# Altium PCB PCB.PcbDoc
Units mm, origin at the board's own origin, x right, y up, seen from the top; angles counter-clockwise.
Board outline 150 x 100 mm, 2 copper layers (Top Layer, Bottom Layer); 15 components, 9 nets, 59 pads, 1 vias.
Unrouted connection lines stored in the file: 2.
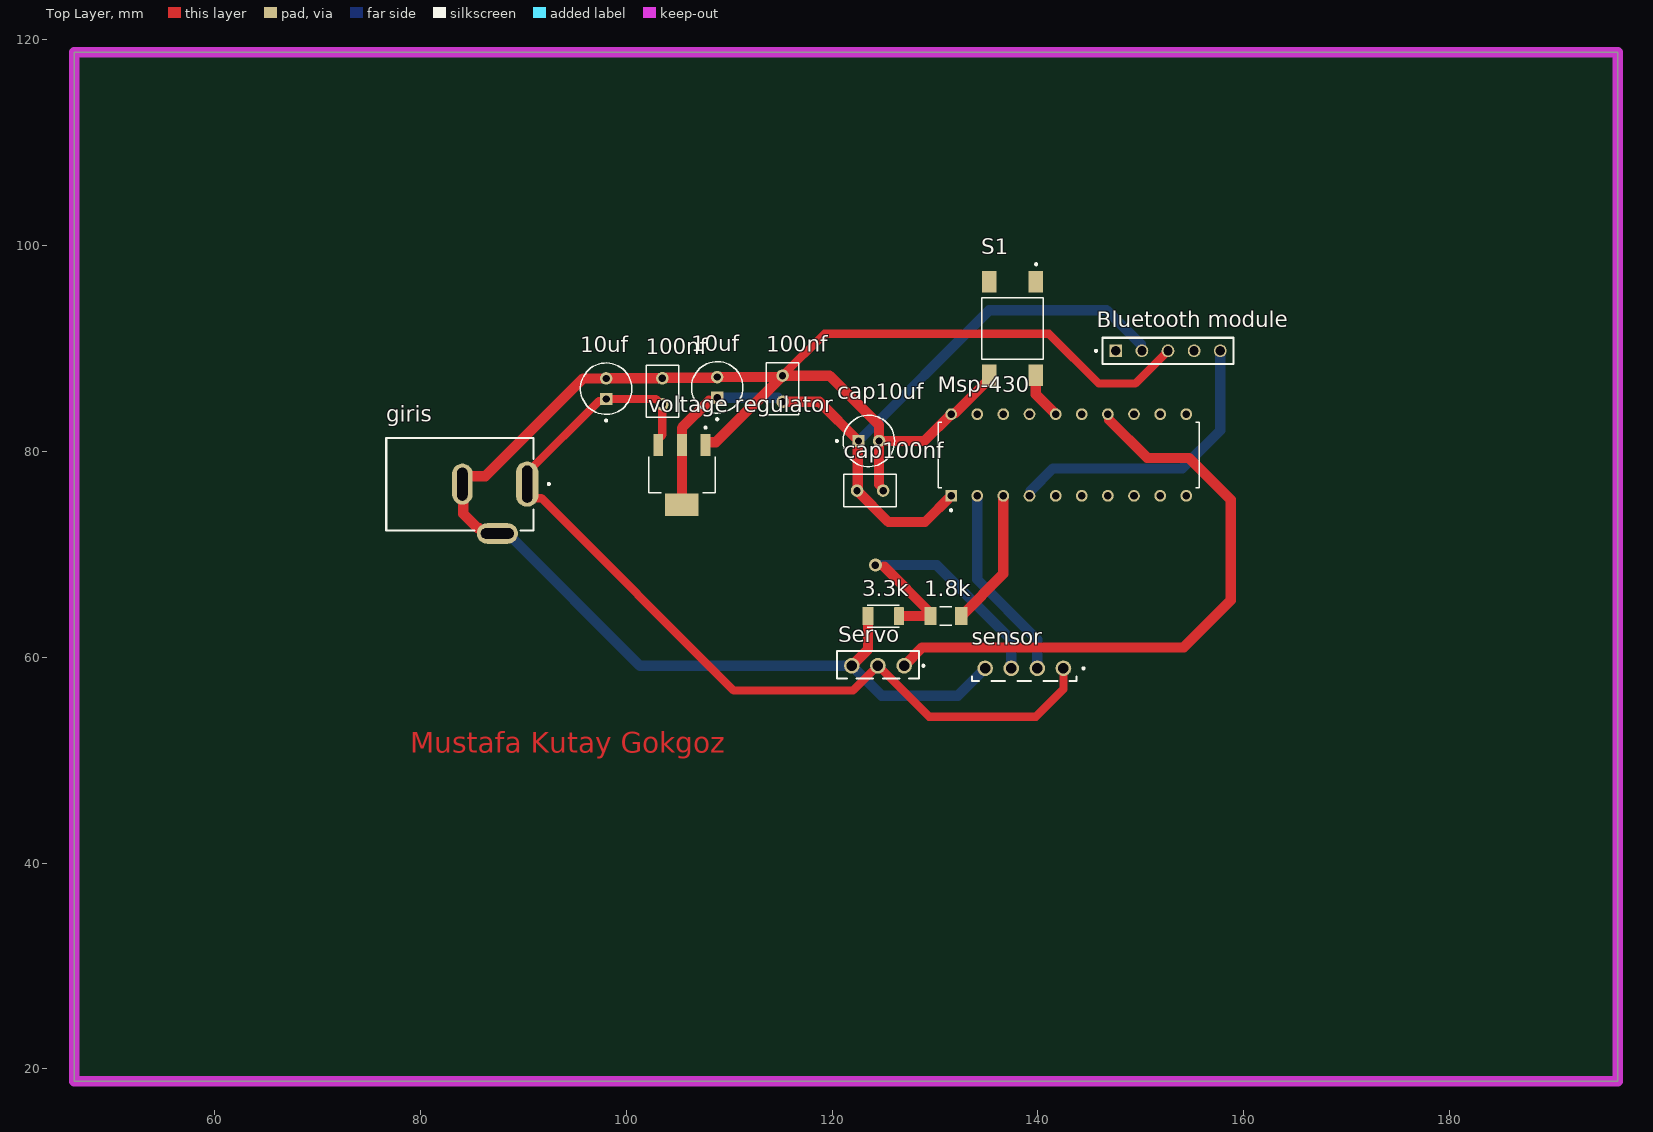
[diagram p0: Top Layer view]
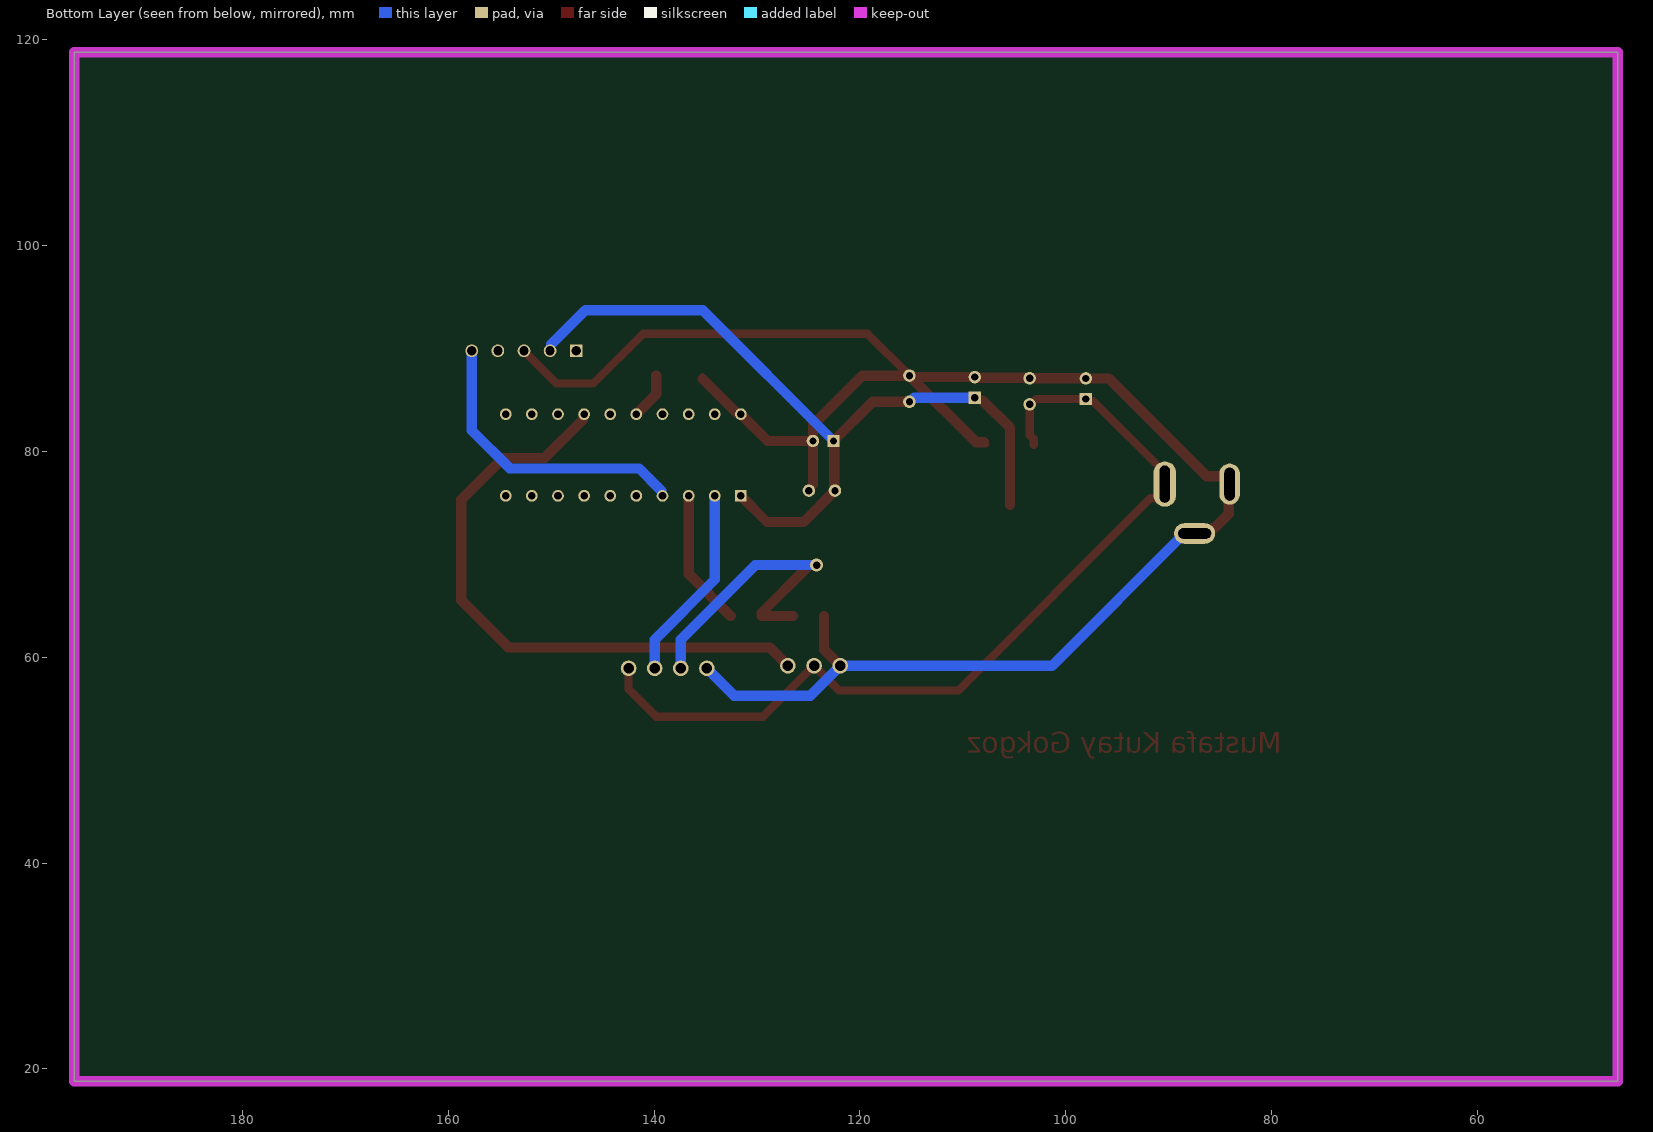
[diagram p1: Bottom Layer view, seen from below]
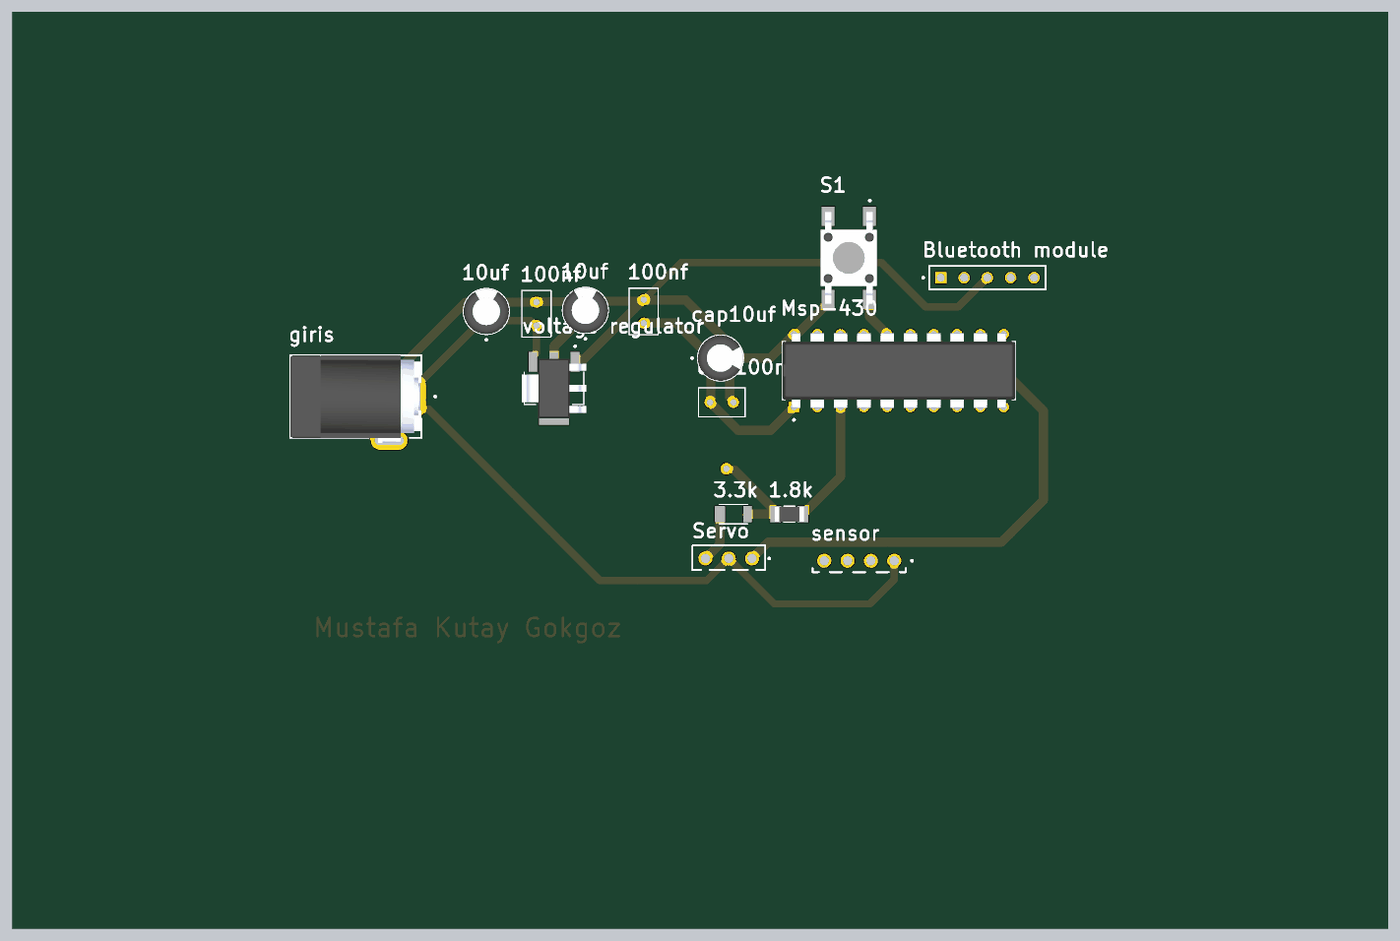
[diagram p2: 3D render of the assembled board from above, using the file's embedded part models]

## Layer stack, top to bottom
Top Solder: solder mask 0.0102, Solder Resist, Dk 3.5
Top Layer: signal copper 0.0356
Dielectric 1: dielectric 0.32, FR-4, Dk 4.8
Bottom Layer: signal copper 0.0356
Bottom Solder: solder mask 0.0102, Solder Resist, Dk 3.5

## Board outline
46.355,18.796 46.355,118.796 196.355,118.796 196.355,18.796

## Design rules (kind name [scope] priority, off if disabled: settings)
Clearance [All] p1: gap=0.254 ignorepadtopadclearanceinfootprint=FALSE except(0: Arc-Hole Track-Hole SMDPad-Hole THPad-Hole Via-Hole Fill-Hole Poly-Hole Region-Hole Text-Hole)
PolygonConnect [All] p1: connectstyle=Relief reliefconductorwidth=0.254 reliefentries=4 polygonreliefangle="90 Angle" airgapwidth=0.254
RoutingVias [All] p1: holewidth=0.711 width=1.27 viastyle="Through Hole" minholewidth=0.711 minwidth=1.27 maxholewidth=0.711 maxwidth=1.27
SolderMaskExpansion [All] p1: expansion=0.102 istentingtop=FALSE
Width [All] p1: maxlimit=1 minlimit=0.254 preferedwidth=0.6 minimp=50.000000 maximp=50.000000 favimp=50.000000
30 further rules are at their usual default settings.

## Classes and differential pairs
component class Sheet1: 1.8k 3.3k 10uf 100nf "Bluetooth module" cap10uf cap100nf giris Msp-430 S1 sensor Servo "voltage regulator"

## Components (designator, comment, footprint, x,y, rotation, side; value= is the part's Value field where it differs from the comment)
1.8k "1.8k" RESC3216X75N 131.064,64.008 r0 top
3.3k "3.3k" RESC3115X65N 124.968,64.008 r0 top
10uf "10uf reg_giris" CAPPRD200W50D550H1250 98.044,86.106 r90 top
10uf "10uf  msp" CAPPRD200W50D550H1250 108.839,86.233 r90 top
100nf "100nf msp" CAPRR254W50L508T317H508 115.189,86.106 r270 top
100nf "100nf _reg_giris" CAPRR254W50L508T317H508 103.505,85.852 r90 top
"Bluetooth module" "BCS-105-F-S-TE" SAMTEC_BCS-105-F-S-TE 152.654,89.789 r0 top
cap10uf "10uf" CAPPRD200W50D550H1250 123.571,81.026 r0 top
cap100nf "100nf" CAPRR254W50L508T317H508 123.698,76.2 r0 top
giris "DCJ200-10-A-XX-K_REVA" GCT_DCJ200-10-A-XX-K_REVA 83.82,76.835 r270 top
Msp-430 "MSP430G2553IN20" DIP794W45P254L2540H508Q20 143.002,79.662 r90 top
S1 "3-1437565-0" SW_3-1437565-0 137.541,91.948 r270 top
sensor "MTLW-104-X-X-S-X" SAMTEC_MTLW-104-X-X-S-X 138.684,58.928 r0 top
Servo "MTLW-103-XX-XX-S-XXX" SAMTEC_MTLW-103-XX-XX-S-XXX 124.46,59.182 r0 top
"voltage regulator" "LM1117MPX-3.3" VREG_LM1117MPX-3.3 105.41,77.724 r270 top

## Footprints (in the part's own frame and the unit in brackets; to place one, negate y for a bottom-side part, rotate by r counter-clockwise, add the part's x,y. Pads: shape width x height; smd on the part's side, far side on the other; paste and mask are expansions set on the pad)
CAPPRD200W50D550H1250 [mm]
  rect 1.208x1.208 hole 0.7: 1(-1,0)
  round 1.208 hole 0.7: 2(1,0)
  silkscreen extent -3.2,-2.5 2.5,2.5, body extent -2.5,-2.5 2.5,2.5, height 12.5
CAPRR254W50L508T317H508 [mm]
  round 1.218 hole 0.71: 1(-1.27,0) 2(1.27,0)
  silkscreen extent -2.54,-1.59 2.54,1.59
DIP794W45P254L2540H508Q20 [mm]
  rect 1.14x1.14 hole 0.74: 1(-3.97,11.43)
  round 1.14 hole 0.74: 2(-3.97,8.89) 3(-3.97,6.35) 4(-3.97,3.81) 5(-3.97,1.27) 6(-3.97,-1.27) 7(-3.97,-3.81) 8(-3.97,-6.35) 9(-3.97,-8.89) 10(-3.97,-11.43) 11(3.97,-11.43) 12(3.97,-8.89) 13(3.97,-6.35) 14(3.97,-3.81) 15(3.97,-1.27) 16(3.97,1.27) 17(3.97,3.81) 18(3.97,6.35) 19(3.97,8.89) 20(3.97,11.43)
  silkscreen extent -5.47,-12.7 3.18,12.7, body extent -4.1,-12.7 4.1,12.7, height 5.08
GCT_DCJ200-10-A-XX-K_REVA [mm]
  oval 4.4x2.2 hole 1 slot 3.6 at 0 deg: 1(0,6.55)
  oval 4x2 hole 1 slot 3.2 at 0 deg: 2(0,0.25)
  oval 2x4 hole 1 slot 3.2 at 90 deg: 3(4.8,3.65)
  silkscreen extent -4.5,-7.15 4.5,8.75, body extent -4.5,-7.15 5.05,7.15, height 11
RESC3115X65N [mm]
  rrect14% 1.09x1.77 smd: 1(-1.465,0)
  rrect14% 0.94x1.77 smd: 2(1.54,0)
  silkscreen extent -1.55,-1.06 1.55,1.06
RESC3216X75N [mm]
  rect 1.17x1.77 smd: 1(-1.494,0) 2(1.494,0)
  silkscreen extent -0.59,-0.88 0.59,0.88, body extent -1.6,-0.8 1.6,0.8, height 0.75
SAMTEC_BCS-105-F-S-TE [mm]
  rect 1.24x1.24 hole 0.89: 01(-5.08,0)
  round 1.24 hole 0.89: 02(-2.54,0) 03(0,0) 04(2.54,0) 05(5.08,0)
  silkscreen extent -7.1,-1.27 6.35,1.27
SAMTEC_MTLW-103-XX-XX-S-XXX [mm]
  round 1.52 hole 1.02: 01(2.54,0) 02(0,0) 03(-2.54,0)
  silkscreen extent -3.97,-1.24 4.51,1.42
SAMTEC_MTLW-104-X-X-S-X [mm]
  round 1.52 hole 1.02: 01(3.81,0) 02(1.27,0) 03(-1.27,0) 04(-3.81,0)
  silkscreen extent -5.08,-1.24 5.85,0.1
SW_3-1437565-0 [mm]
  rect 2.1x1.4 smd: 1(-4.55,2.25) 2(4.55,2.25) 3(-4.55,-2.25) 4(4.55,-2.25)
  silkscreen extent -6.35,-3 3,3, body extent -5,-3 5,3, height 4.59
VREG_LM1117MPX-3.3 [mm]
  rect 2.15x0.95 smd: 1(-2.9,2.3) 2(-2.9,0) 3(-2.9,-2.3)
  rect 2.15x3.25 smd: 4(2.9,0)
  silkscreen extent -4.7,-3.25 1.75,3.25, body extent -3.5,-3.25 3.5,3.25, height 1.8

## Part data
1.8k: library part CR1206-JW-182ELF, Package=None, Availability=Unavailable, MF="{'manufacturer': u'Bourns'}", MP=CR1206-JW-182ELF, Price=None
3.3k: library part 4-2176245-3, Package=None, Availability=Unavailable, MF="{'manufacturer': u'TE Connectivity'}", MP=4-2176245-3, Price=None
10uf 10uf cap10uf: library part UVR1V100MDD, Package=None, Availability=Unavailable, MF="{'manufacturer': u'Nichicon'}", MP=UVR1V100MDD, Price=None
100nf 100nf cap100nf: library part SR291C104KARTR1, Package=None, Availability=Unavailable, MF="{'manufacturer': u'AVX'}", MP=SR291C104KARTR1, Price=None
"Bluetooth module" giris Msp-430 S1 sensor Servo "voltage regulator": Package=None, Availability=Unavailable, Price=None
  "Bluetooth module": MF="{'manufacturer': u'Samtec'}", MP=BCS-105-F-S-TE
  giris: MF="{'manufacturer': u'Global Connector Technology'}", MP=DCJ200-10-A-XX-K_REVA
  Msp-430: MF="{'manufacturer': u'Texas Instruments'}", MP=MSP430G2553IN20
  S1: MF="{'manufacturer': u'TE Connectivity'}", MP=3-1437565-0
  sensor: MF="{'manufacturer': u'Samtec'}", MP=MTLW-104-X-X-S-X
  Servo: MF="{'manufacturer': u'Samtec'}", MP=MTLW-103-XX-XX-S-XXX
  "voltage regulator": MF="{'manufacturer': u'Texas Instruments'}", MP=LM1117MPX-3.3

## Via types
v1: diameter 1.27, hole 0.711, Top Layer to Bottom Layer, 1 vias

## Nets (pads, with @x,y where several pads share a name; then routed paths per layer and width w, separated by ;. In a path a pad name is that pad's centre, name@x,y a point inside that pad or via, vN(x,y) a via of type N, cw(c..) or ccw(c..) an arc to the next point about the centre after c; other vN are vias at no path point)
3.3v: 10uf.1@108.839,85.233 100nf.2@115.189,84.836 "Bluetooth module.02" "voltage regulator.2" "voltage regulator.4" cap10uf.1 cap100nf.1 Msp-430.1 | length 78.8
  Top Layer w0.6: 108.043,84.929 108.535,84.929 10uf.1@108.839,85.233 ; 100nf.2@115.022,84.836 100nf.2@115.189,84.836 ; cap100nf.1 cap100nf.1@122.5,76.272 ; cap10uf.1@122.5,80.955 cap10uf.1
  Top Layer w1: 105.41,74.824 105.41,80.624 105.41,82.296 108.043,84.929 ; 100nf.2@115.189,84.836 118.761,84.836 cap10uf.1 ; cap100nf.1 125.476,73.152 129.032,73.152 Msp-430.1 ; cap100nf.1@122.5,76.272 cap10uf.1@122.5,80.955
  Bottom Layer w0.6: 149.992,90.419 149.992,89.911 150.114,89.789
  Bottom Layer w1: 10uf.1@108.839,85.233 114.733,85.233 115.13,84.836 100nf.2@115.189,84.836 ; cap10uf.1 135.271,93.726 146.685,93.726 149.992,90.419
5v: 10uf.1@98.044,85.106 100nf.1@103.505,84.582 "voltage regulator.3" giris.1 sensor.01 Servo.02 | length 88.6
  Top Layer w0.8: 103.11,80.624 103.11,81.224 103.505,81.619 103.505,84.582 103.392,84.582 102.868,85.106 98.044,85.106 97.84,84.902 97.337,84.902 90.37,77.935 giris.1 90.37,76.114 91.017,75.467 91.738,75.467 110.436,56.769 122.047,56.769 Servo.02 129.413,54.229 139.827,54.229 142.494,56.896 sensor.01
GND: 3.3k.1 10uf.2 100nf.1@115.189,87.376 100nf.2@103.505,87.122 "Bluetooth module.03" "voltage regulator.1" cap10uf.2 cap100nf.2 giris.2 giris.3 Msp-430.20 S1.3 S1.4 sensor.04 Servo.03 | length 186.9
  Top Layer w0.5: giris.2@84.166,76.739 giris.2 84.07,76.892 giris.2@84.763,77.585 ; 10uf.2@98.044,87.106 10uf.2@98.052,87.114 ; 100nf.2@103.497,87.114 103.505,87.122 100nf.2@103.56,87.177 ; 107.71,80.624 107.71,80.674 107.935,80.899 ; 10uf.2@108.783,87.177 10uf.2@108.839,87.233 ; 124.571,76.791 124.968,76.394 cap100nf.2 ; Msp-430.20 131.694,83.754 Msp-430.20@131.997,83.754 ; S1.4@135.291,87.048 S1.4
  Top Layer w0.8: 100nf.1@115.189,87.376 119.253,91.44 141.097,91.44 145.923,86.614 149.479,86.614 152.654,89.789
  Top Layer w1: giris.2@84.166,76.739 84.166,73.949 85.58,72.535 85.699,72.535 86.199,72.035 giris.3 ; giris.2@84.763,77.585 86.279,77.585 95.8,87.106 10uf.2@98.044,87.106 ; 10uf.2@98.052,87.114 100nf.2@103.497,87.114 ; 100nf.2@103.56,87.177 10uf.2@108.783,87.177 ; 107.935,80.899 108.712,80.899 115.189,87.376 119.761,87.376 124.571,82.566 cap10uf.2 ; 10uf.2@108.839,87.233 100nf.1@114.852,87.233 ; Servo.03 123.503,60.765 3.3k.1 ; 124.571,76.791 cap10uf.2 ; Msp-430.20 128.966,81.026 cap10uf.2 ; Msp-430.20@131.997,83.754 S1.4@135.291,87.048
  Bottom Layer w0.8: giris.3 giris.3@88.47,72.035
  Bottom Layer w1: giris.3@88.47,72.035 101.323,59.182 Servo.03 124.841,56.261 132.207,56.261 sensor.04
Net1.8k_1: 1.8k.1 3.3k.2 sensor.03 | length 29.7
  Top Layer w0.5: v1(124.206,68.961) 124.353,68.814 125.064,68.814 ; 1.8k.1 1.8k.1@129.57,64.308
  Top Layer w1: 125.064,68.814 1.8k.1@129.57,64.308 ; 3.3k.2 1.8k.1
  Bottom Layer w1: v1(124.206,68.961) 130.175,68.961 137.414,61.722 sensor.03
Net1.8k_2: 1.8k.2 Msp-430.3 | length 13.4
  Top Layer w1: 1.8k.2 136.652,68.102 Msp-430.3
NetMsp-430_14: Msp-430.14 Servo.01 | length 59.8
  Top Layer w0.6: Msp-430.14 146.915,83.529 Msp-430.14@146.915,83.082
  Top Layer w1: Servo.01 128.778,60.96 154.178,60.96 158.75,65.532 158.75,75.311 154.686,79.375 150.622,79.375 Msp-430.14@146.915,83.082
NetMsp-430_16: Msp-430.16 S1.1 S1.2 | length 4.6
  Top Layer w1: S1.2 139.791,85.573 Msp-430.16
p1.0: Msp-430.2 sensor.02 | length 19.2
  Bottom Layer w1: Msp-430.2 134.112,67.564 139.954,61.722 sensor.02
p1.2: "Bluetooth module.05" Msp-430.4 | length 29.1
  Bottom Layer w0.6: Msp-430.4 139.295,75.795 Msp-430.4@139.295,76.176
  Bottom Layer w1: Msp-430.4@139.295,76.176 141.478,78.359 154.051,78.359 157.734,82.042 157.734,89.789
pads on no net: "Bluetooth module.01" "Bluetooth module.04" Msp-430.5 Msp-430.6 Msp-430.7 Msp-430.8 Msp-430.9 Msp-430.10 Msp-430.11 Msp-430.12 Msp-430.13 Msp-430.15 Msp-430.17 Msp-430.18 Msp-430.19

## Keep-outs
Keep-Out Layer:
  the board outline again, w1

## Other copper
Top Layer:
  text "Mustafa Kutay Gokgoz" at 78.994,50.704 h2